# Altium PCB PCB1.PcbDoc
Units mil, origin at the board's own origin, x right, y up, seen from the top; angles counter-clockwise.
Board outline 1240 x 835 mil, 2 copper layers (Top Layer, Bottom Layer); 24 components, 14 nets, 59 pads, 6 vias.
Unrouted connection lines stored in the file: 1.
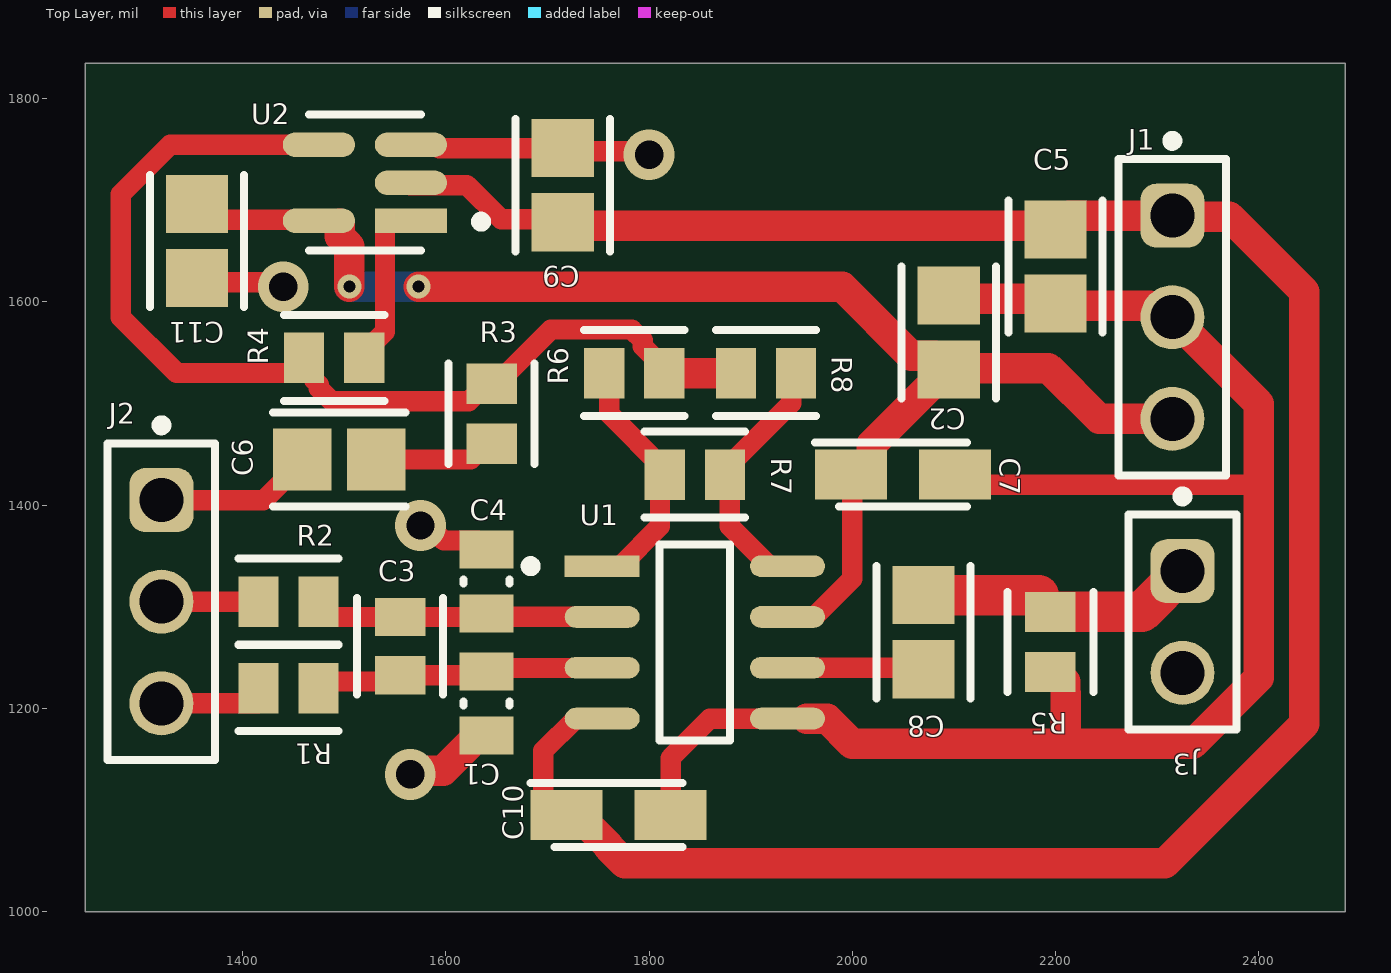
[diagram p0: Top Layer view]
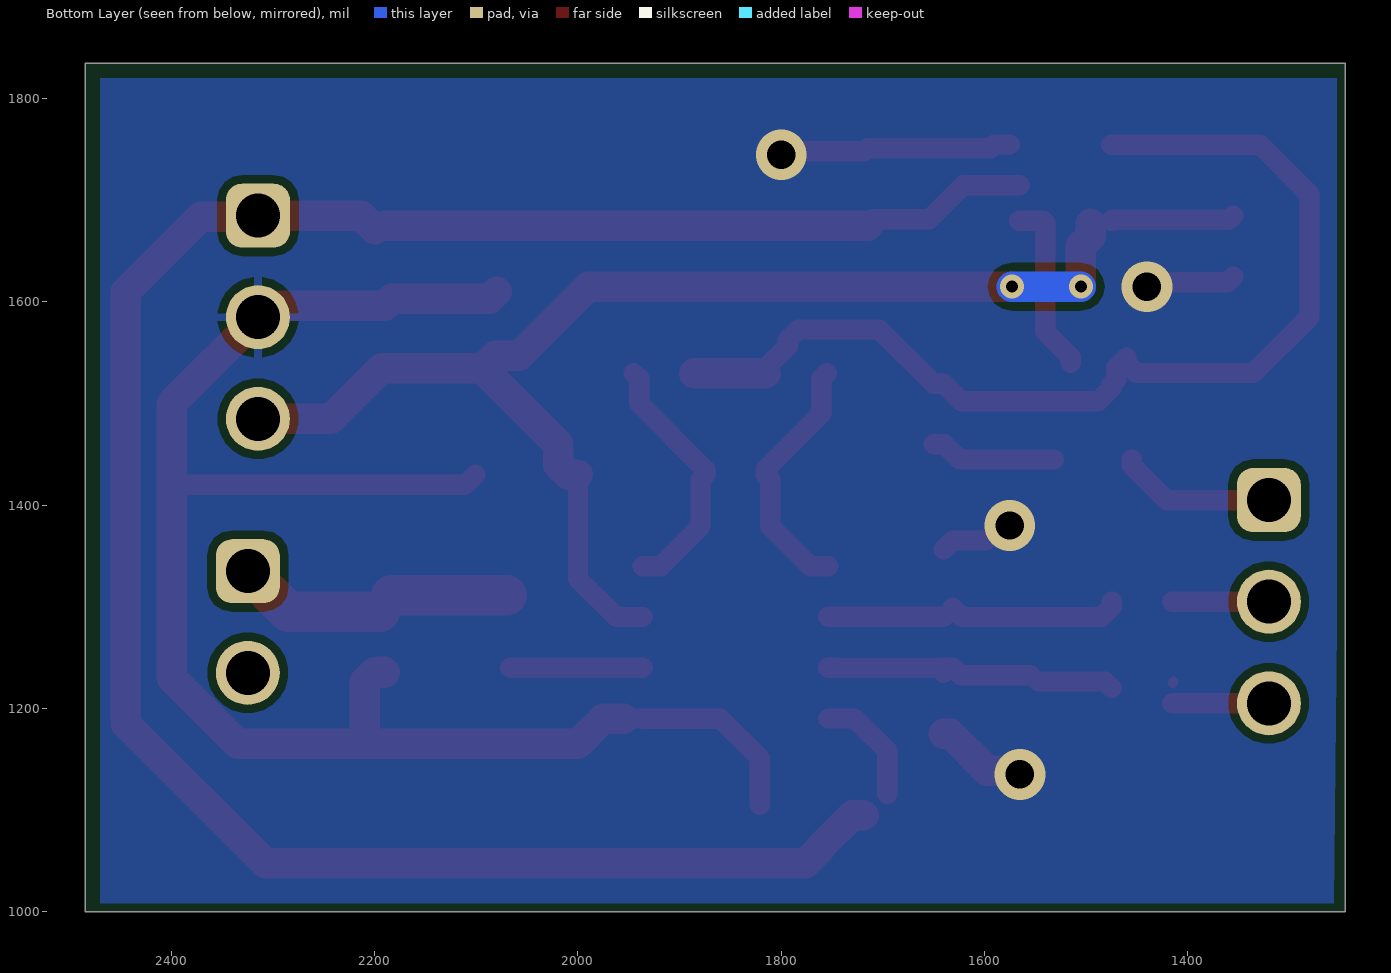
[diagram p1: Bottom Layer view, seen from below]
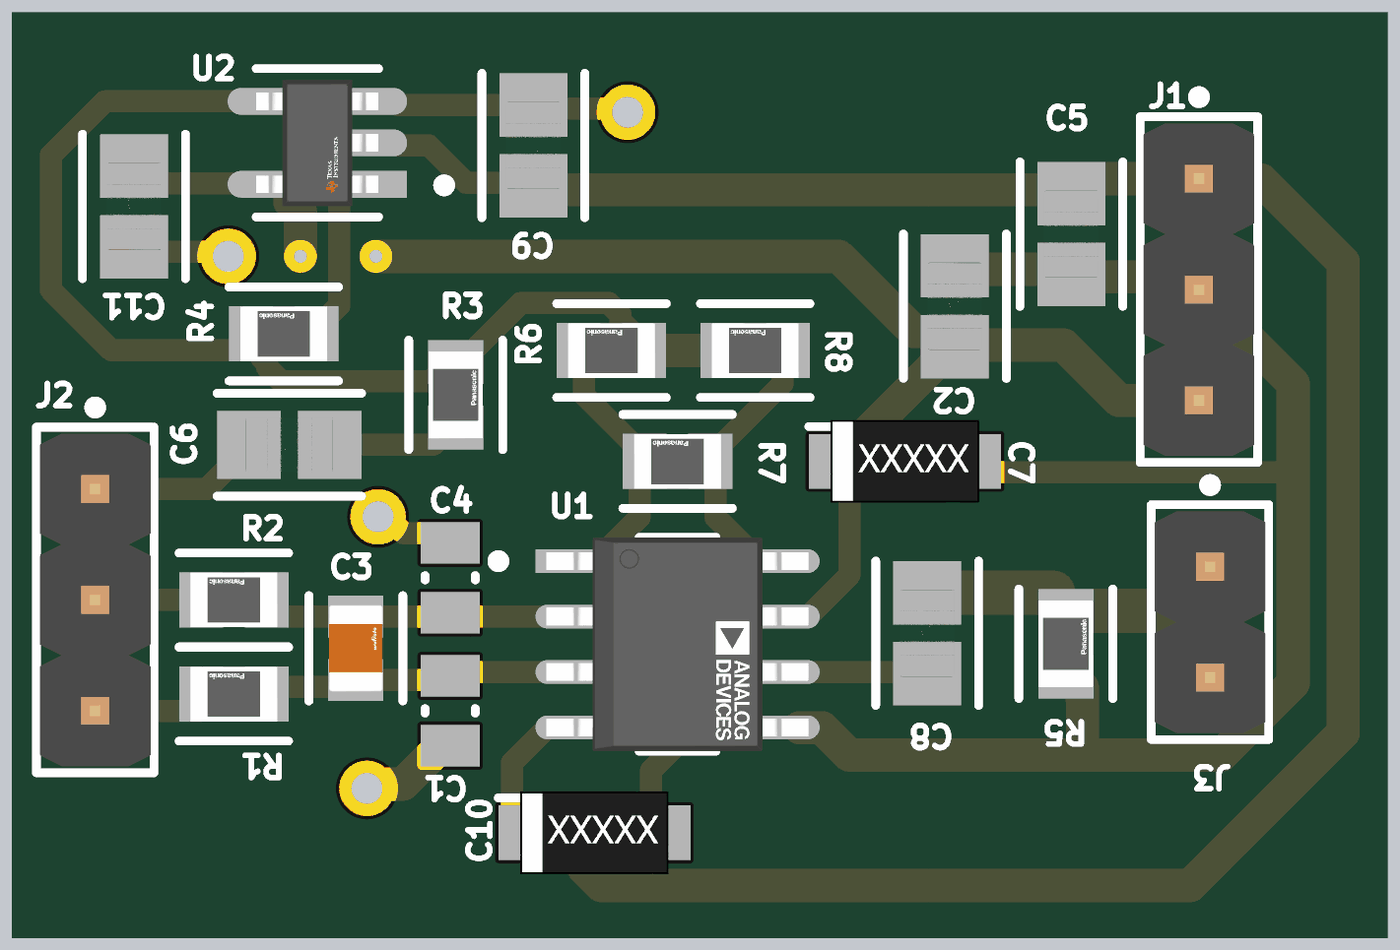
[diagram p2: 3D render of the assembled board from above, using the file's embedded part models]

## Layer stack, top to bottom
Top Solder: solder mask 0.4, Solder Resist, Dk 3.5
Top Layer: signal copper 1.4
Dielectric 1: dielectric 12.6, FR-4, Dk 4.8
Bottom Layer: signal copper 1.4
Bottom Solder: solder mask 0.4, Solder Resist, Dk 3.5

## Board outline
1245,1000 2485,1000 2485,1835 1245,1835

## Design rules (kind name [scope] priority, off if disabled: settings)
BoardOutlineClearance [All] p1: gap=7.87 ignorepadtopadclearanceinfootprint=FALSE
Clearance [All] p1: gap=8 ignorepadtopadclearanceinfootprint=FALSE except(9.84: Arc-Hole Track-Hole SMDPad-Hole THPad-Hole Via-Hole Fill-Hole Poly-Hole Region-Hole Text-Hole)
ComponentClearance [All] p1: gap=5 collisioncheckmode=3 verticalgap=5 showdistances=TRUE
DiffPairsRouting [All] p1: maxlimit=15 minlimit=8 mostfreqgap=8 toplayer_minwidth=8 toplayer_maxwidth=1000 toplayer_prefwidth=8 bottomlayer_minwidth=8 bottomlayer_maxwidth=1000 bottomlayer_prefwidth=8 maxuncoupledlength=500
Height [All] p1: minheight=0 maxheight=71497.94 prefheight=500
HoleSize [All] p1: absolutevalues=TRUE maxlimit=248.03 minlimit=11.81 maxpercent=80.000 minpercent=20.000
HoleToHoleClearance [All] p1: gap=9.84 allowstackedmicrovias=FALSE
MinimumAnnularRing [All] p1: minimumring=3
MinimumSolderMaskSliver [All] p1: minsoldermaskwidth=0
PlaneClearance [All] p1: clearance=8
PlaneConnect PlaneConnectPowerPads [InPadClass('PowerPads')] p1: planeconnectstyle=Direct reliefexpansion=20 reliefentries=4 reliefconductorwidth=10 reliefairgap=10
PlaneConnect [All] p2: pad.planeconnectstyle=Relief pad.reliefexpansion=11.81 pad.reliefentries=4 pad.reliefconductorwidth=8 pad.reliefairgap=8 via.planeconnectstyle=Direct via.reliefexpansion=11.81 via.reliefentries=4 via.reliefconductorwidth=5 via.reliefairgap=5
PolygonConnect PolygonConnectPowerPads [All vs (InPadClass('PowerPads'))] p1: connectstyle=Direct reliefconductorwidth=10 reliefentries=4 polygonreliefangle="90 Angle" airgapwidth=10
PolygonConnect [All] p2: thpad.connectstyle=Relief thpad.reliefconductorwidth=8 thpad.reliefentries=4 thpad.polygonreliefangle="90 Angle" thpad.airgapwidth=8 smdpad.connectstyle=Relief smdpad.reliefconductorwidth=8 smdpad.reliefentries=4 smdpad.polygonreliefangle="90 Angle" smdpad.airgapwidth=8 via.connectstyle=Direct via.reliefconductorwidth=5 via.reliefentries=4 via.polygonreliefangle="90 Angle" via.airgapwidth=5
RoutingVias [All] p1: holewidth=11.81 width=23.62 viastyle="Through Hole" minholewidth=11.81 minwidth=23.62 maxholewidth=23.62 maxwidth=259.84
SilkToSilkClearance [All] p1: silktosilkclearance=0
SilkToSolderMaskClearance [IsPad] p1: minsilkscreentomaskgap=5 clearancetoexposedcopper=TRUE
SolderMaskExpansion [All] p1: expansion=2.95 istentingtop=FALSE
Width [All] p1: maxlimit=1000 minlimit=8 preferedwidth=8 minimp=50.000000 maximp=50.000000 favimp=50.000000
20 further rules are at their usual default settings.

## Components (designator, comment, footprint, x,y, rotation, side; value= is the part's Value field where it differs from the comment)
C1 "1nF" CAPC0805(2012)145_L 1640,1205 r270 top
C2 "0.1uF" FP-CL21-IPC_A 2095,1570 r90 top
C3 "47nF" FP-GRM21B-0_1-IPC_C 1555,1261.37 r90 top
C4 "1nF" CAPC0805(2012)145_L 1640,1325 r270 top
C5 "0.1uF" FP-CL21-IPC_A 2200,1635 r270 top
C6 "0.1uF" FP-CL21-IPC_A 1495,1445 r0 top
C7 "593D106X96R3A2TE3" CAPPM3216X180N 2050,1430 r0 top
C8 "0.1uF" FP-CL21-IPC_A 2070,1275 r90 top
C9 "0.1uF" FP-CL21-IPC_A 1715,1715 r90 top
C10 "593D106X96R3A2TE3" CAPPM3216X180N 1770,1095 r0 top
C11 "0.1uF" FP-CL21-IPC_A 1355,1660 r90 top
J1 "61300311121" 61300311121 2315,1585 r270 top
J2 "61300311121" 61300311121 1320,1305 r270 top
J3 "61300211121" 61300211121 2325,1285 r270 top
R1 "4k" FP-ERA6A-IPC_C 1445,1220 r180 top
R2 "4k" FP-ERA6A-IPC_C 1445,1305 r180 top
R3 "ERA6AEB102V" FP-ERA6A-IPC_C 1645,1490 r90 top
R4 "ERA6AEB102V" FP-ERA6A-IPC_C 1490,1545 r180 top
R5 "ERA6AEB102V" FP-ERA6A-IPC_C 2195,1265.44 r90 top
R6 "10k" FP-ERA6A-IPC_C 1785.44,1530 r180 top
R7 "100" FP-ERA6A-IPC_C 1845,1430 r180 top
R8 "10k" FP-ERA6A-IPC_C 1915,1530 r180 top
U1 "AD620BRZ-R7" FP-R-8-IPC_C 1845,1265 r0 top
U2 "TLV9151IDBVR" FP-DBV0005A-IPC_A 1520.29,1717.4 r180 top

## Footprints (in the part's own frame and the unit in brackets; to place one, negate y for a bottom-side part, rotate by r counter-clockwise, add the part's x,y. Pads: shape width x height; smd on the part's side, far side on the other; paste and mask are expansions set on the pad)
61300211121 [mm] "Pin Header, pitch 2.54 mm, THT, Vertical, single row, 2p"
  rrect50% 1.6x1.6 hole 1.1: 1(-1.27,0)
  round 1.6 hole 1.1: 2(1.27,0)
  silkscreen extent -3.26,-1.35 2.69,1.35, body extent -2.54,-1.27 2.54,1.27, height 8.57
61300311121 [mm] "Pin Header, pitch 2.54 mm, THT, Vertical, single row, 3p"
  rrect50% 1.6x1.6 hole 1.1: 1(-2.54,0)
  round 1.6 hole 1.1: 2(0,0) 3(2.54,0)
  silkscreen extent -4.53,-1.35 3.96,1.35, body extent -3.81,-1.27 3.81,1.27, height 8.57
CAPC0805(2012)145_L [mm] "Chip Capacitor, Body 2.0x1.2mm, Height 1.45mm, IPC High Density"
  rect 0.95x1.35 smd: 1(-0.8,0) 2(0.8,0)
  silkscreen extent -0.05,-0.58 0.05,0.58, body extent -1.1,-0.72 1.1,0.72, height 1.45
CAPPM3216X180N [mm]
  rect 1.8x1.25 smd: 1(-1.3,0) 2(1.3,0)
  silkscreen extent -2.2,-0.8 1.6,0.8, body extent -1.7,-0.95 1.7,0.95, height 1.83
FP-CL21-IPC_A [mil]
  rect 57.27x61.27 smd paste+0 mask+0: 1(-36.45,0) 2(36.45,0)
  silkscreen extent -65,-46 65,46, body extent -39,-25 39,25, height 57
FP-DBV0005A-IPC_A [mm]
  rect 1.805x0.612 smd paste+0 mask+0: 1(-1.15,0.95)
  rrect100% 1.805x0.612 smd paste+0 mask+0: 2(-1.15,0) 3(-1.15,-0.95) 4(1.15,-0.95) 5(1.15,0.95)
  silkscreen extent -3.03,-1.7 1.4,1.7, body extent -1.4,-1.45 1.4,1.45, height 1.45
FP-ERA6A-IPC_C [mil]
  rect 39.55x49.69 smd paste+0 mask+0: 1(-29.56,0) 2(29.56,0)
  silkscreen extent -49,-42 49,42, body extent -53,-31 53,31, height 10
FP-GRM21B-0_1-IPC_C [mil]
  rect 37.71x49.69 smd paste+0 mask+0: 1(-28.63,0) 2(28.63,0)
  silkscreen extent -47,-42 47,42, body extent -51,-31 51,31, height 10
FP-R-8-IPC_C [mil]
  rect 73.78x21.34 smd paste+0 mask+0: 1(-91.18,75)
  rrect100% 73.78x21.34 smd paste+0 mask+0: 2(-91.18,25) 3(-91.18,-25) 4(-91.18,-75) 5(91.18,-75) 6(91.18,-25) 7(91.18,25) 8(91.18,75)
  silkscreen extent -166,-96 35,96, body extent -132,-100 132,100, height 10

## Part data
C1 C4: library part CMP-1036-02976-1, "CAP 1nF 50V ±5% 0805 (2012 Metric) Thickness 1.45mm SMD", Case-EIA=0805, Case-Metric=2012, Rated Voltage="50 V", Tolerance=Â±5%, Max Thickness="1.45 mm", Technology=SMT
C2 C5 C6 C8 C9 C11: library part CMP-13271-004391-1, "CL21 Series 0805 100nF 25V ±20% Tolerance X7R Multilayer Ceramic Chip Capacitor, CL21B104MACNNNC", Capacitance=100nF, Case Code (Imperial)=0805, Case Code (Metric)=2012, Dielectric=X7R, Max Operating Temperature=125°C, Min Operating Temperature=-55°C, Package Quantity=1, Tolerance=20%, Voltage Rating=25V, Case/Package=0805, Construction=Flat, Depth=1.25mm, Height=0.85mm, Lead Free="Lead Free", Length=2mm, Mount="Surface Mount", Packaging="Tape and Reel", Radiation Hardening=No, RoHS Compliant=Yes, Series=CL, Thickness=0.037inch, Voltage Rating (DC)=25V, Width=0.049inch
C3: library part CMP-06035-029151-1, "Chip Multilayer Ceramic Capacitors for General Purpose, 0805, 47000pF, SL, +350/-1000ppm/°C, 5%, 50V,   GRM21B1X1H473JA01L", Case Code (Imperial)=0805, Case Code (Metric)=2012, Max Operating Temperature=125°C, Min Operating Temperature=-55°C, Tolerance=5%, Voltage Rating=50V, Capacitance=47nF, Case/Package=0805, Lead Free="Lead Free", Length=0.079inch, Mount="Surface Mount", Packaging="Tape and Reel", Termination=SMD/SMT, Thickness=0.053inch, Voltage Rating (DC)=50V, Width=0.049inch
C7 C10: "Capacitor Polarised", Manufacturer_Name=Vishay, Mouser Part Number=N/A, Datasheet Link=https://www.vishay.com/docs/40005/593d.pdf, Height=1.8mm, Manufacturer_Part_Number=593D106X96R3A2TE3, Mouser Price/Stock=https://www.mouser.com/Search/Refine.aspx?Keyword=N%2FA
J1 J2: library part CMP-1502-01062-3, Color=Black, Contact Resistance=20mΩ, Current Rating=3A, Max Operating Temperature=105°C, Min Operating Temperature=-40°C, Operating Supply Voltage=250V, Connector Type="Male Pin", Contact Material=Copper, Contact Mating Length=5.9944mm, Contact Plating=Gold, Gender=Male, Height=8.94mm, Lead Free="Lead Free", Lead Pitch=2.54mm, Mount="Through Hole", NexarPartId=32855521, Number of Contacts=3, Number of Pins=3, Number of Positions=3, Number of Rows=1, Orientation=Vertical, Packaging=Bulk, Pitch=2.54mm, REACH SVHC=Unknown, RoHS=Compliant, Termination=Solder, Voltage Rating=250V
J3: library part CMP-1712-00002-6, Color=Black, Contact Resistance=20mΩ, Current Rating=3A, Max Operating Temperature=125°C, Min Operating Temperature=-40°C, Operating Supply Voltage=250V, Connector Type="Male Pin", Contact Gender=Male, Contact Material=Copper, Contact Mating Length=5.9944mm, Contact Plating=Gold, Gender=Male, Height=8.94mm, Housing Material=PBT, Lead Free="Lead Free", Lead Pitch=2.54mm, Mount="Through Hole", NexarPartId=20081794, Number of Contacts=2, Number of Pins=2, Number of Positions=2, Number of Rows=1, Orientation=Vertical, Packaging=Bulk, Pitch=2.54mm, REACH SVHC="No SVHC", RoHS=Compliant, Termination="Through Hole", Voltage Rating=250V
R1 R2 R7 R8: library part CMP-2001-00581-2, "RES 1K OHM 0.1% 1/8W 0805,  ERA6AEB102V", Case Code (Imperial)=0805, Case Code (Metric)=2012, Max Operating Temperature=155°C, Max Power Dissipation=125mW, Min Operating Temperature=-55°C, Package Quantity=5000, Resistance=1kR, Resistance Tolerance=0.1%, Resistor Type="Thin Film", Temperature Coefficient=25ppm/°C, Voltage Rating=100V, Case/Package=0805, Construction=Rectangular, Contact Plating=Tin, Depth=1.25mm, Height=0.5mm, Length=2mm, Military Standard=Not, Mount="Surface Mount", Number of Pins=2, Number of Terminations=2, Packaging="Tape and Reel", Power Rating=125mW, Radiation Hardening=No, REACH SVHC="No SVHC", RoHS Compliant=Yes, Series=ERA-6A, Technology="THIN FILM", Termination=SMD/SMT, Tolerance=0.1%, Width=1.25mm, Working Voltage=100V
R3 R4 R5: library part CMP-2001-00581-2, "RES 1K OHM 0.1% 1/8W 0805", Case Code (Imperial)=0805, Case Code (Metric)=2012, Max Operating Temperature=155°C, Max Power Dissipation=125mW, Min Operating Temperature=-55°C, Package Quantity=5000, Resistance=1kR, Resistance Tolerance=0.1%, Resistor Type="Thin Film", Temperature Coefficient=25ppm/°C, Voltage Rating=100V, Case/Package=0805, Construction=Rectangular, Contact Plating=Tin, Depth=1.25mm, Height=0.5mm, Length=2mm, Military Standard=Not, Mount="Surface Mount", Number of Pins=2, Number of Terminations=2, Packaging="Tape and Reel", Power Rating=125mW, Radiation Hardening=No, REACH SVHC="No SVHC", RoHS Compliant=Yes, Series=ERA-6A, Technology="THIN FILM", Termination=SMD/SMT, Tolerance=0.1%, Width=1.25mm, Working Voltage=100V
R6: library part CMP-2001-00581-2, "RES 1K OHM 0.1% 1/8W 0805,    ERA6AEB102V", Case Code (Imperial)=0805, Case Code (Metric)=2012, Max Operating Temperature=155°C, Max Power Dissipation=125mW, Min Operating Temperature=-55°C, Package Quantity=5000, Resistance=1kR, Resistance Tolerance=0.1%, Resistor Type="Thin Film", Temperature Coefficient=25ppm/°C, Voltage Rating=100V, Case/Package=0805, Construction=Rectangular, Contact Plating=Tin, Depth=1.25mm, Height=0.5mm, Length=2mm, Military Standard=Not, Mount="Surface Mount", Number of Pins=2, Number of Terminations=2, Packaging="Tape and Reel", Power Rating=125mW, Radiation Hardening=No, REACH SVHC="No SVHC", RoHS Compliant=Yes, Series=ERA-6A, Technology="THIN FILM", Termination=SMD/SMT, Tolerance=0.1%, Width=1.25mm, Working Voltage=100V
U1: library part CMP-09116-000394-1, "IC INST AMP 1 CIRCUIT 8SOIC", Case/Package=SOIC, Input Bias Current=1nA, Input Offset Voltage (Vos)=30mV, Input Resistance=10GR, Max Dual Supply Voltage=18V, Max Operating Temperature=125°C, Max Power Dissipation=650mW, Min Dual Supply Voltage=2.3V, Min Operating Temperature=-55°C, Min Supply Voltage=4.6V, Nominal Supply Current=1.3mA, Output Current per Channel=18mA, Package Quantity=1, -3db Bandwidth=1MHz, Amplifier Type="INSTRUMENTATION AMPLIFIER", Common Mode Rejection Ratio=93dB, Contact Plating=Tin, Lead Free="Contains Lead", Mount="Surface Mount", Number of Channels=1, Number of Circuits=1, Number of Elements=1, Number of Pins=8, Operating Supply Current=1.3mA, Operating Supply Voltage=18V, Packaging="Tape and Reel", Power Dissipation=650mW, Radiation Hardening=No, RoHS Compliant=Yes, Series=-, Slew Rate=1.2V/µs
U2: library part CMP-04895-000336-1, "OPAMP"

## Via types
v1: diameter 50, hole 28, Top Layer to Bottom Layer, 4 vias
v2: diameter 23.62, hole 11.81, Top Layer to Bottom Layer, 2 vias

## Nets (pads, with @x,y where several pads share a name; then routed paths per layer and width w, separated by ;. In a path a pad name is that pad's centre, name@x,y a point inside that pad or via, vN(x,y) a via of type N, cw(c..) or ccw(c..) an arc to the next point about the centre after c; other vN are vias at no path point)
+5: C2.1 C7.1 C11.2 J1.3 U1.7 U2.5 | length 1382.8
  Top Layer w20: C11.2@1355,1685 1359.22,1680.78 1474.22,1680.78 U2.5 ; U1.7 1962.4,1290 2000,1327.6 C7.1@2000,1428.82
  Top Layer w30: U2.5@1495.54,1677.05 1495.54,1664.46 1505,1655 v2(1505,1615) ; v2(1573.05,1615) 1990,1615 2057.81,1547.19 2081.37,1547.19 C2.1 2093,1533.55 2019.25,1459.8 2019.25,1439.61 2009.65,1430 C7.1@2000,1430 ; C2.1@2095,1535 2193.08,1535 2243.08,1485 J1.3
  Bottom Layer w30: v2(1505,1615) v2(1573.05,1615)
-5: C5.1 C9.1 C10.1 J1.1 U1.4 U2.2 | length 2247.8
  Top Layer w20: U2.2@1565,1715 1620.78,1715 1654.37,1681.41 C9.1@1710,1681.41 ; C10.1@1695.74,1115.74 1695.74,1158.14 1727.6,1190 U1.4
  Top Layer w30: C9.1@1715,1675 C5.1@2190,1675 ; C10.1 1729.65,1095 1760.47,1064.18 1760.47,1063.15 1776.22,1047.39 2307.39,1047.39 2445,1185 2445,1610 2371.2,1683.8 2331.44,1683.8 2330.96,1684.27 J1.1@2330.96,1690.96 ; C5.1 2213.55,1685 J1.1@2314.6,1685
GND: C1.2 C2.2 C4.1 C5.2 C7.2 C9.2 C10.2 C11.1 J1.2 R5.1 U1.5 U2.3 | length 2188.5
  Top Layer w20: C11.1@1355,1625 1360.72,1619.28 1435.72,1619.28 v1(1440,1615) ; v1(1575,1380) 1583.12,1380 1597.92,1365.2 1631.3,1365.2 C4.1 ; U2.3@1575,1755 1589.99,1755 1593.54,1751.45 C9.2 1718.22,1748.22 1796.78,1748.22 v1(1800,1745) ; C10.2@1821.18,1105 1821.18,1151.18 1859.74,1189.74 1935.93,1189.74 U1.5 U1.5@1955,1190 ; C7.2 2111.18,1420 2400,1420
  Top Layer w30: v1(1565,1135) 1568.83,1138.83 1597.45,1138.83 1633.62,1175 C1.2@1640,1175 ; U1.5@1955,1189.74 1975.26,1189.74 2000,1165 2210,1165 ; C2.2@2080,1610 2086.78,1603.22 2183.22,1603.22 2190,1596.45 2292.82,1596.45 2309.27,1580 J1.2@2310,1580 ; R5.1 2190.88,1235.88 2190,1235 2200.95,1235 2209.85,1226.11 2209.85,1215.15 2210,1215 2210,1165 ; J1.2 2400,1500 2400,1420 2400,1230 2335,1165 2210,1165
In1: C1.1 C3.1 R1.1 U1.3 | length 278.3
  Top Layer w20: R1.1 1480.93,1226.37 C3.1@1546.37,1226.37 ; C3.1 1623.37,1232.74 1630.63,1240 C1.1@1640,1240 ; C1.1@1640,1235 1644.74,1239.74 1744.74,1239.74 1745,1240 U1.3
In2: C3.2 C4.2 R2.1 U1.2 | length 283.4
  Top Layer w20: R2.1 1474.56,1299.93 1484.33,1290.15 1489.4,1290.15 1489.56,1290 C3.2 1622.13,1290 C4.2@1631.06,1298.94 ; C4.2@1640,1290 1640.26,1290.26 1753.56,1290.26 U1.2
LA: J2.2 R2.2 | length 95
  Top Layer w20: J2.2 R2.2@1415,1305
NetC6_2: C6.2 R3.1 | length 124.8
  Top Layer w20: C6.2 1624.49,1445 1639.49,1460 R3.1@1650,1460
NetC8_1: C8.1 U1.6 | length 130.4
  Top Layer w20: U1.6 C8.1@2066.55,1240
NetR6_2: R6.2 R7.2 U1.1 | length 244.5
  Top Layer w20: U1.1 1771.38,1340 1810.67,1379.29 R7.2@1810.67,1425.67 ; R6.2@1755,1530 1760.66,1524.34 1760.66,1489.85 1815.44,1435.07 R7.2
NetR7_1: R7.1 R8.1 U1.8 | length 248.7
  Top Layer w20: R7.1 1874.56,1435.07 1939.78,1500.29 1939.78,1524.78 R8.1@1945,1530 ; R7.1@1879.33,1425.67 1879.33,1379.29 1918.62,1340 U1.8
output: C8.2 J3.1 R5.2 | length 260.1
  Top Layer w40: C8.2 R5.2@2183.55,1311.45 ; R5.2 2285,1295 J3.1
RA: J2.3 R1.2 | length 96.8
  Top Layer w10: R1.2@1413.74,1226.26 R1.2@1415,1225
  Top Layer w20: J2.3 R1.2@1415,1205
RLD: C6.1 J2.1 R4.1 U2.1 | length 329.5
  Top Layer w20: J2.1 1420.55,1405 1455,1439.45 C6.1@1455,1445 ; R4.1@1515,1540 1515,1545.51 1540.05,1570.56 1540.05,1677.95 1542.1,1680 U2.1
RLi: R3.2 R4.2 R6.1 R8.2 U2.4 | length 1053.8
  Top Layer w20: U2.4 1328.63,1754.8 1280,1706.17 1280,1585 1334.85,1530.15 1450.67,1530.15 1460.44,1539.93 R4.2 1470.22,1535.22 1470.22,1523.22 1475,1518.44 1475,1515 1487.85,1502.15 1622.53,1502.15 1639.93,1519.56 1650.07,1519.56 1703.36,1572.85 1783.12,1572.85 1793.66,1562.3 1793.66,1556.41 1815,1535.07 R6.1
  Top Layer w30: R6.1 R8.2
pads on no net: J3.2

## Polygon pours and split planes (outlines as drawn)
GND on Bottom Layer "GND_L02_P001" (solid, pour order 1): 1246.56,1820 2470,1820 2470,1005 1256.31,1005